# Altium PCB 3X2.5.PcbDoc
Units mm, origin at the board's own origin, x right, y up, seen from the top; angles counter-clockwise.
Board outline 25.5 x 30 mm, 4 copper layers (Top Layer, GND, MidLayer1, Bottom Layer); 24 components, 59 nets, 208 pads, 117 vias.
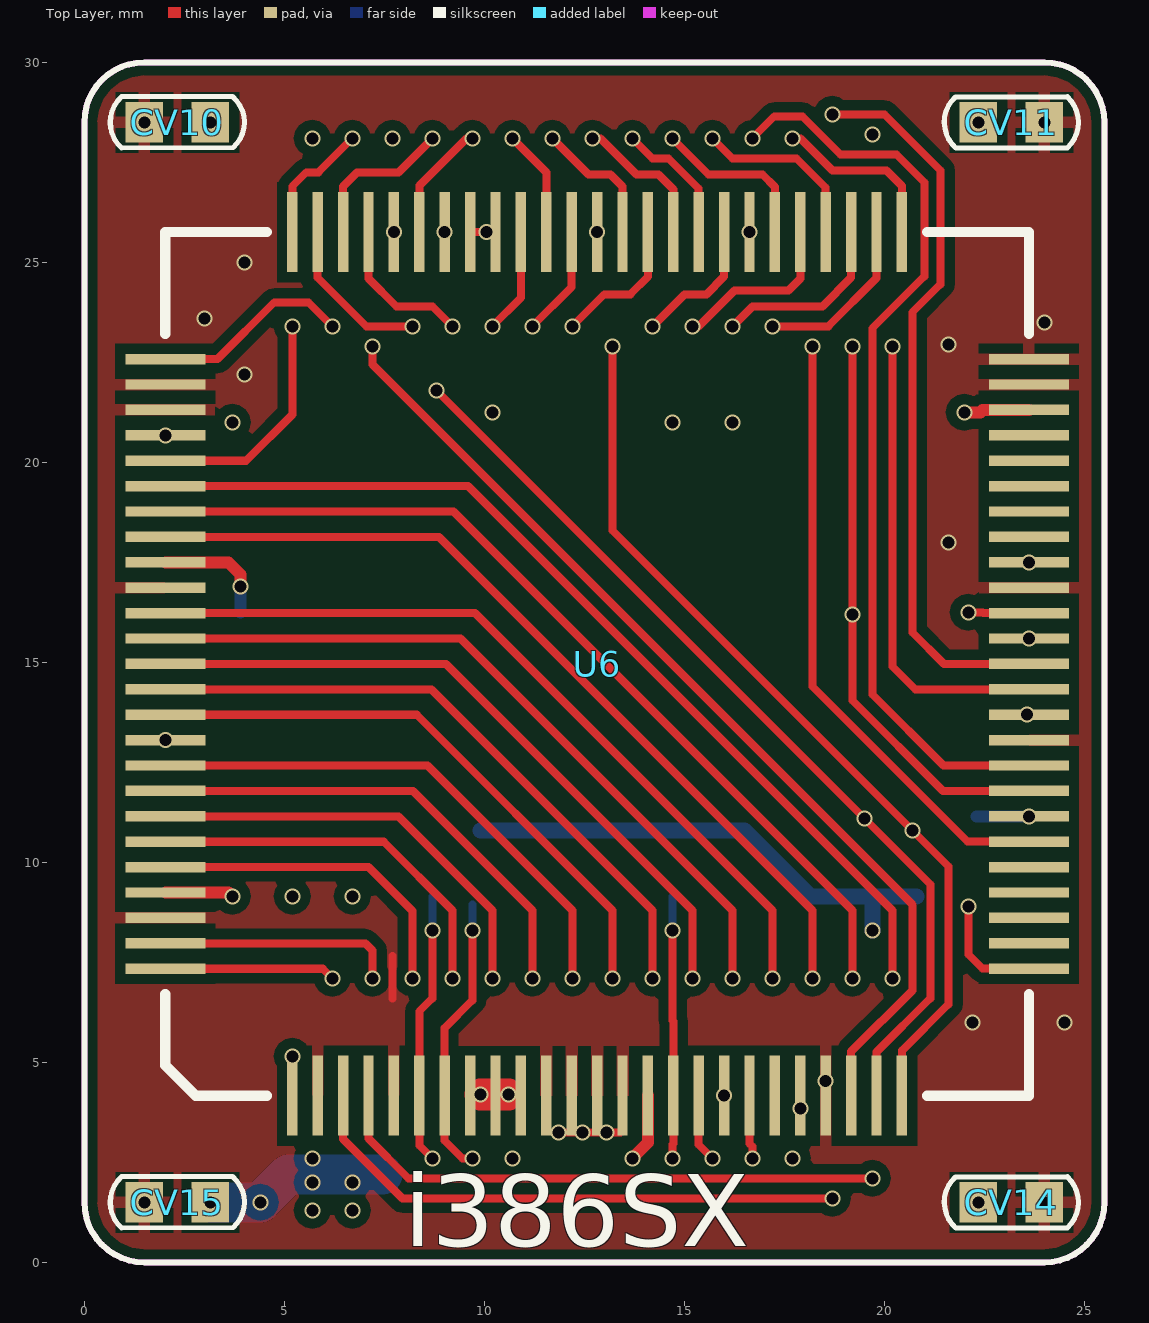
[diagram p0: Top Layer view]
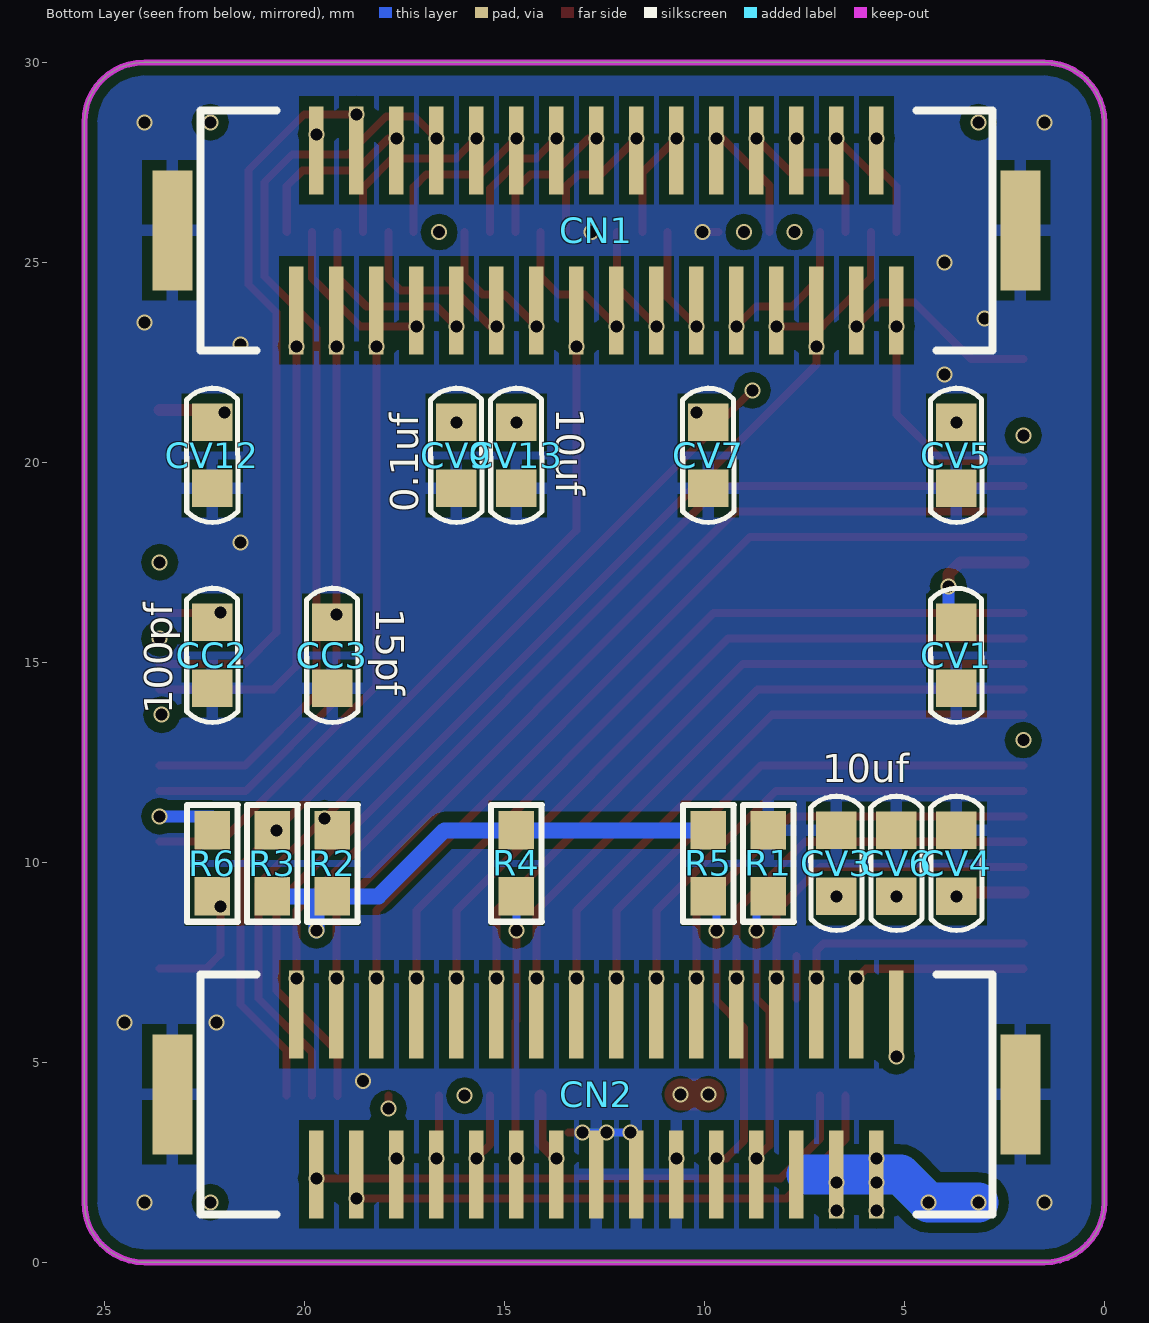
[diagram p1: Bottom Layer view, seen from below]
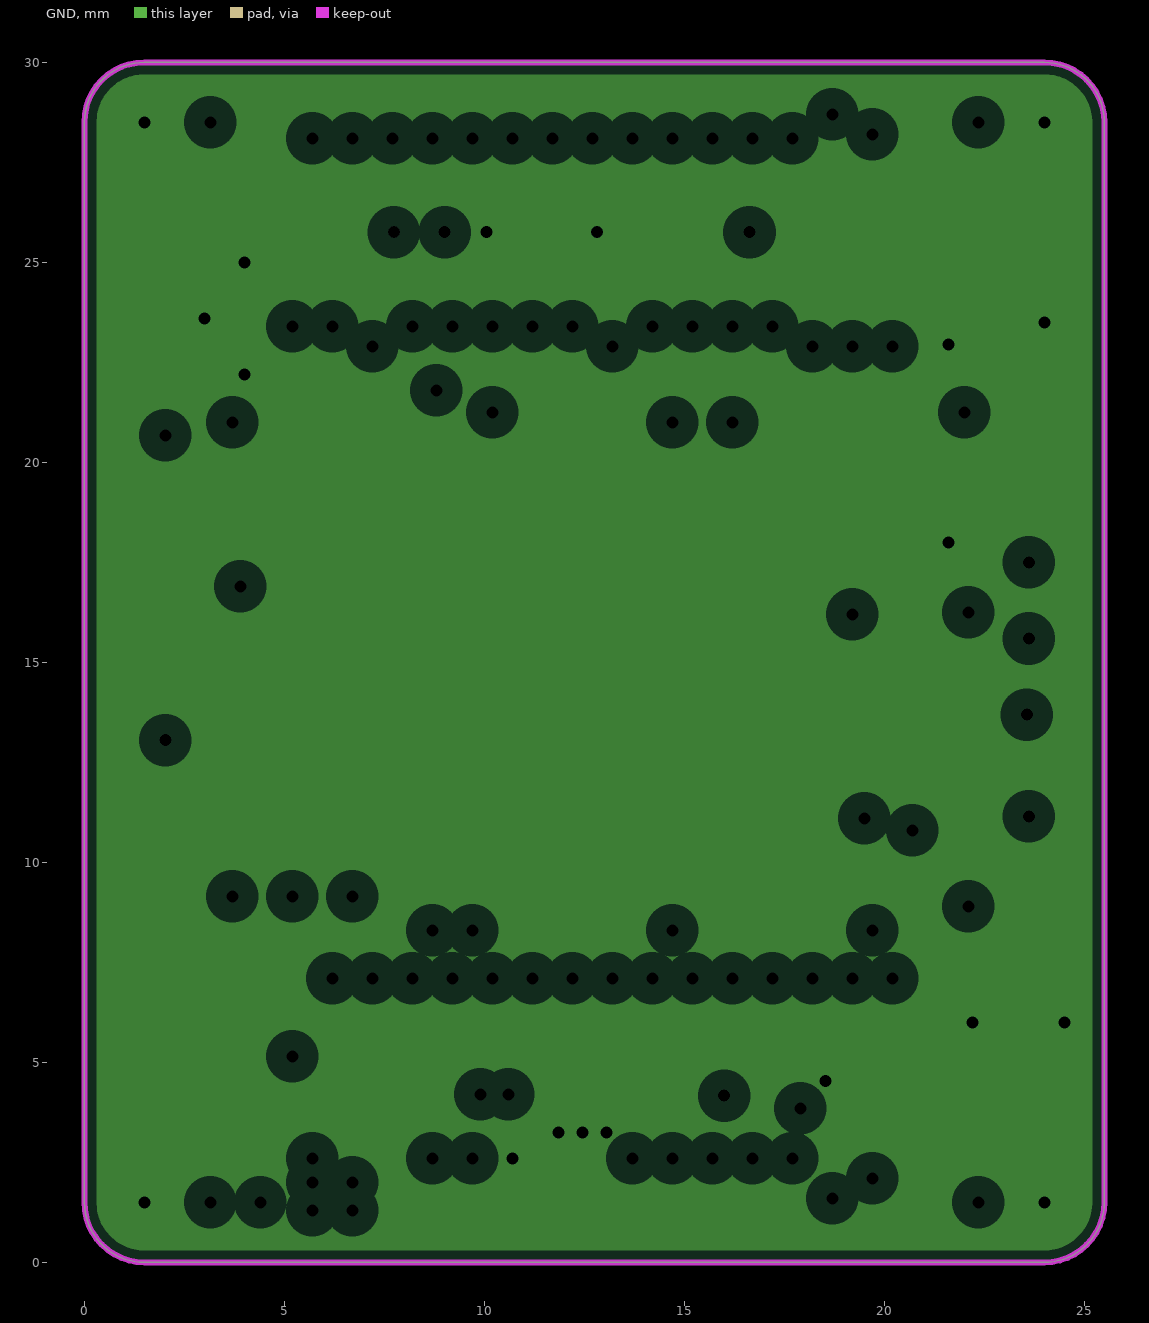
[diagram p2: GND, clearances drawn from the general rule]
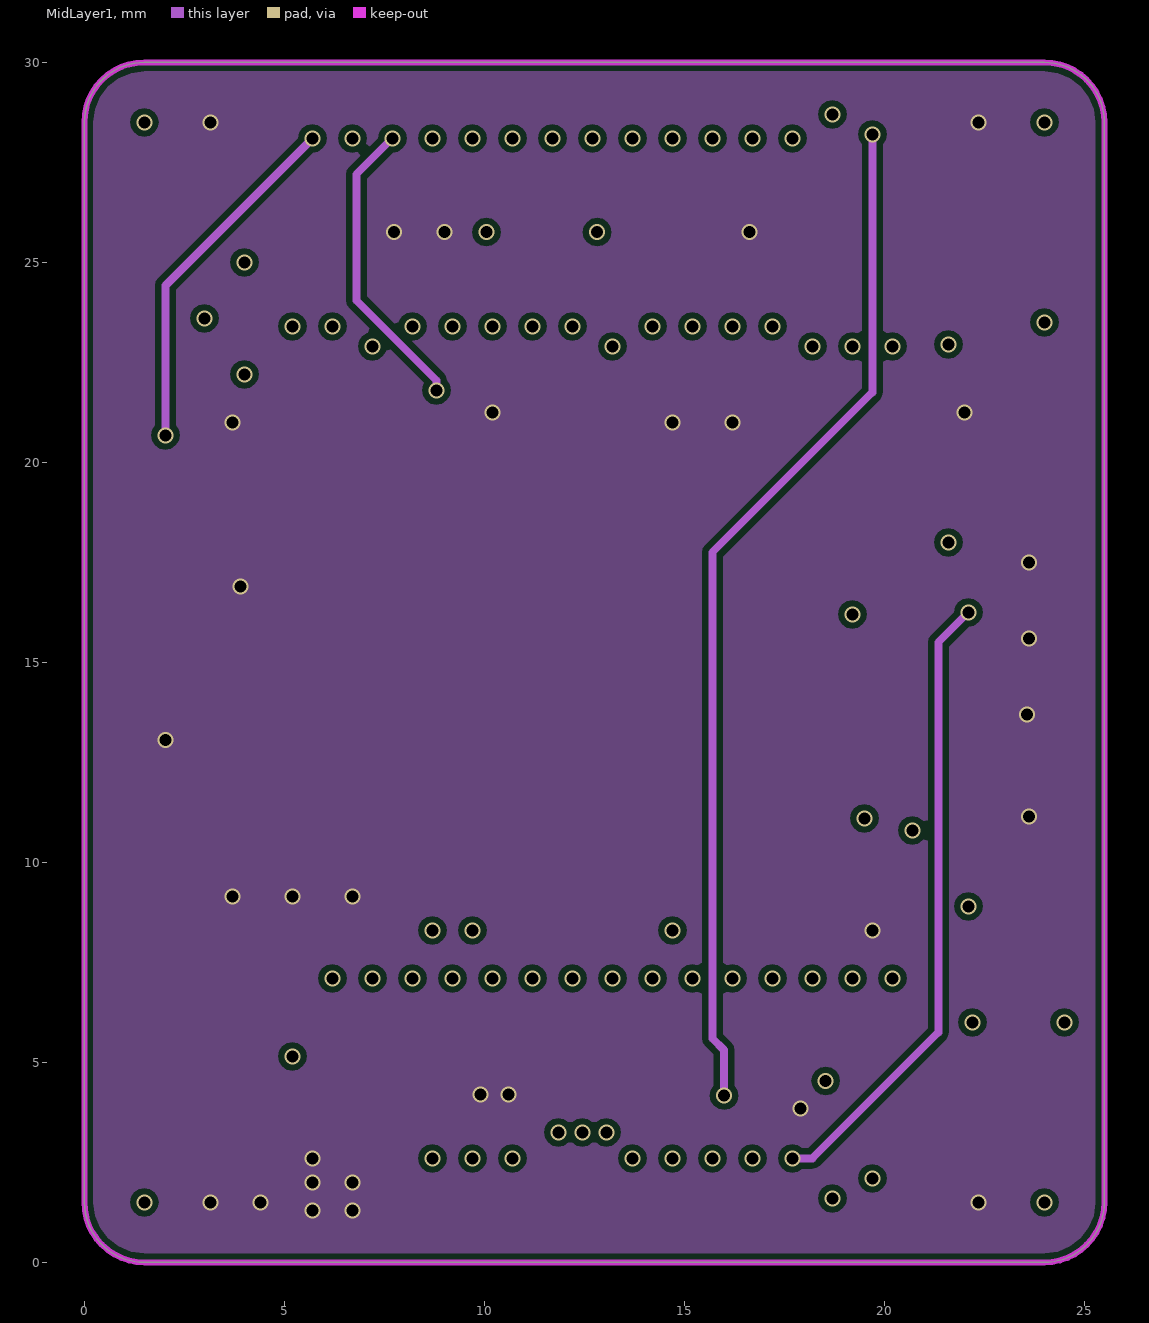
[diagram p3: MidLayer1]

## Layer stack, top to bottom
Top Layer: signal copper 0.0356
Dielectric: core 0.32, FR-4, Dk 4.8
GND: plane copper 0.0356, net GND
Dielectric: prepreg 0.32, FR-4, Dk 4.8
MidLayer1: signal copper 0.0356
Dielectric: core 0.32, FR-4, Dk 4.8
Bottom Layer: signal copper 0.0356

## Board outline
0,1.5 ccw(c1.5,1.5) 1.5,0 24,0 ccw(c24,1.5) 25.5,1.5 25.5,28.5 ccw(c24,28.5) 24,30 1.5,30 ccw(c1.5,28.5) 0,28.5

## Design rules (kind name [scope] priority, off if disabled: settings)
Clearance [All] p1: gap=0.15
ComponentClearance [All] p1: gap=0.254 collisioncheckmode=3 verticalgap=0.254
HoleSize [All] p1: absolutevalues=TRUE maxlimit=7.62 minlimit=0.3 maxpercent=80.000 minpercent=20.000
PlaneClearance [All] p1: clearance=0.508
PlaneConnect [All] p1: planeconnectstyle=Relief reliefexpansion=0.508 reliefentries=4 reliefconductorwidth=0.254 reliefairgap=0.254
PolygonConnect [All] p1: connectstyle=Relief reliefconductorwidth=0.3 reliefentries=4 polygonreliefangle="90 Angle"
RoutingVias [All] p1: holewidth=0.3 width=0.4 viastyle="Through Hole" minholewidth=0.3 minwidth=0.4 maxholewidth=0.3 maxwidth=0.4
SolderMaskExpansion [All] p1: expansion=0.102
TestPointUsage [All] p1: valid=0 allowmultiple=FALSE
Testpoint [All] p1: side=15 testpointundercomponent=TRUE minsize=1.016 maxsize=2.54 preferedsize=1.524 minholesize=0 maxholesize=1.016 preferedholesize=0.813 testpointgrid=0.025 style=1023 order=0-112345678
Width [All] p1: maxlimit=5 minlimit=0.2 preferedwidth=0.254 toplayer_prefwidth=0.2 midlayer1_prefwidth=0.2 bottomlayer_prefwidth=0.2 minimp=50.000000 maximp=50.000000 favimp=50.000000
15 further rules are at their usual default settings.

## Components (designator, comment, footprint, x,y, rotation, side; value= is the part's Value field where it differs from the comment)
CC2 "100pf" C0603 22.3,16 r270 bottom
CC3 "15pf" C0603 19.3,16 r270 bottom
CN1 "CON31P" BTB1.0-31P-B 20.2,23.8 r180 bottom
CN2 "CON31P" BTB1.0-31P-B 5.2,6.2 r0 bottom
CV1 "0.1uf" C0603 3.7,16 r270 bottom
CV3 "0.1uf" C0603 6.7,9.15 r90 bottom
CV4 "0.1uf" C0603 3.7,9.15 r90 bottom
CV5 "10uf" C0603 3.7,21 r270 bottom
CV6 "10uf" C0603 5.2,9.15 r90 bottom
CV7 "0.1uf" C0603 9.9,21 r270 bottom
CV9 "0.1uf" C0603 16.2,21 r270 bottom
CV10 "10uf" C0603 3.15,28.5 r180 top
CV11 "10uf" C0603 22.35,28.5 r0 top
CV12 "0.1uf" C0603 22.3,21 r270 bottom
CV13 "10uf" C0603 14.7,21 r270 bottom
CV14 "0.1uf" C0603 22.35,1.5 r0 top
CV15 "0.1uf" C0603 3.15,1.5 r180 top
R1 "0R" R0603 8.4,9.15 r90 bottom
R2 "4.7k" R0603 19.3,10.8 r270 bottom
R3 "4.7k" R0603 20.8,10.8 r270 bottom
R4 "4.7k" R0603 14.7,9.15 r90 bottom
R5 "4.7k" R0603 9.9,9.15 r90 bottom
R6 "4.7k" R0603 22.3,9.15 r90 bottom
U6 "386SX2" PQFP100A 5.2,4.8 r0 top

## Footprints (in the part's own frame and the unit in brackets; to place one, negate y for a bottom-side part, rotate by r counter-clockwise, add the part's x,y. Pads: shape width x height; smd on the part's side, far side on the other; paste and mask are expansions set on the pad)
BTB1.0-31P-B [mm]
  rect 1x3 smd: 0(-3.1,2) 0(18.1,2)
  rect 0.36x2.2 smd: 1(0,0) 2(1,0) 3(2,0) 4(3,0) 5(4,0) 6(5,0) 7(6,0) 8(7,0) 9(8,0) 10(9,0) 11(10,0) 12(11,0) 13(12,0) 14(13,0) 15(14,0) 16(15,0) 17(14.5,4) 18(13.5,4) 19(12.5,4) 20(11.5,4) 21(10.5,4) 22(9.5,4) 23(8.5,4) 24(7.5,4) 25(6.5,4) 26(5.5,4) 27(4.5,4) 28(3.5,4) 29(2.5,4) 30(1.5,4) 31(0.5,4)
  silkscreen extent -2.4,-1 17.4,5
C0603 [mil]
  rect 37.01x40 smd: 1(0,0)
  rect 37x40 smd: 2(64.98,0)
  silkscreen extent -34,-25 98,25
PQFP100A [mm]
  rect 0.26x2 smd: 1(0,-0.635) 2(0.635,-0.635) 3(1.27,-0.635) 4(1.905,-0.635) 5(2.54,-0.635) 6(3.175,-0.635) 7(3.81,-0.635) 8(4.445,-0.635) 9(5.08,-0.635) 10(5.715,-0.635) 11(6.35,-0.635) 12(6.985,-0.635) 13(7.62,-0.635) 14(8.255,-0.635) 15(8.89,-0.635) 16(9.525,-0.635) 17(10.16,-0.635) 18(10.795,-0.635) 19(11.43,-0.635) 20(12.065,-0.635) 21(12.7,-0.635) 22(13.335,-0.635) 23(13.97,-0.635) 24(14.605,-0.635) 25(15.24,-0.635) 51(15.24,20.955) 52(14.605,20.955) 53(13.97,20.955) 54(13.335,20.955) 55(12.7,20.955) 56(12.065,20.955) 57(11.43,20.955) 58(10.795,20.955) 59(10.16,20.955) 60(9.525,20.955) 61(8.89,20.955) 62(8.255,20.955) 63(7.62,20.955) 64(6.985,20.955) 65(6.35,20.955) 66(5.715,20.955) 67(5.08,20.955) 68(4.445,20.955) 69(3.81,20.955) 70(3.175,20.955) 71(2.54,20.955) 72(1.905,20.955) 73(1.27,20.955) 74(0.635,20.955) 75(0,20.955)
  rect 2x0.26 smd: 26(18.415,2.54) 27(18.415,3.175) 28(18.415,3.81) 29(18.415,4.445) 30(18.415,5.08) 31(18.415,5.715) 32(18.415,6.35) 33(18.415,6.985) 34(18.415,7.62) 35(18.415,8.255) 36(18.415,8.89) 37(18.415,9.525) 38(18.415,10.16) 39(18.415,10.795) 40(18.415,11.43) 41(18.415,12.065) 42(18.415,12.7) 43(18.415,13.335) 44(18.415,13.97) 45(18.415,14.605) 46(18.415,15.24) 47(18.415,15.875) 48(18.415,16.51) 49(18.415,17.145) 50(18.415,17.78) 76(-3.175,17.78) 77(-3.175,17.145) 78(-3.175,16.51) 79(-3.175,15.875) 80(-3.175,15.24) 81(-3.175,14.605) 82(-3.175,13.97) 83(-3.175,13.335) 84(-3.175,12.7) 85(-3.175,12.065) 86(-3.175,11.43) 87(-3.175,10.795) 88(-3.175,10.16) 89(-3.175,9.525) 90(-3.175,8.89) 91(-3.175,8.255) 92(-3.175,7.62) 93(-3.175,6.985) 94(-3.175,6.35) 95(-3.175,5.715) 96(-3.175,5.08) 97(-3.175,4.445) 98(-3.175,3.81) 99(-3.175,3.175) 100(-3.175,2.54)
  silkscreen extent -3.17,-0.64 18.41,20.95
R0603 [mil]
  rect 38x35 smd: 1(0,0) 2(65,0)
  silkscreen extent -25,-25 90,25

## Part data
CC2 CC3 CV1 CV3 CV4 CV5 CV6 CV7 CV9 CV10 CV11 CV12 CV13 CV14 CV15: library part CAP
CN1 CN2: library part CON51P
R1 R2 R3 R4 R5 R6: library part RES2

## Via types
v1: diameter 0.4, hole 0.3, Top Layer to Bottom Layer, 117 vias

## Nets (pads, with @x,y where several pads share a name; then routed paths per layer and width w, separated by ;. In a path a pad name is that pad's centre, name@x,y a point inside that pad or via, vN(x,y) a via of type N, cw(c..) or ccw(c..) an arc to the next point about the centre after c; other vN are vias at no path point)
80MCLK: CN2.23 U6.15 | length 1.7
  Top Layer w0.3: v1(13.7,2.6) 14.09,2.99 U6.15
386/486: CN1.3 U6.31 | length 15.5
  Top Layer w0.2: v1(18.2,22.9) 18.2,14.4 22.085,10.515 U6.31
CA1: CN1.31 U6.18 | length 25.8
  MidLayer1 w0.2: v1(15.995,4.165) 15.995,5.305 15.7,5.6 15.7,17.75 19.7,21.75 v1(19.7,28.2)
CA2: CN1.29 U6.51 | length 4.4
  Top Layer w0.203: v1(17.7,28.1) 17.9,28.1 18.7,27.3 20.05,27.3 20.44,26.91 U6.51
CA3: CN1.4 U6.52 | length 4.3
  Top Layer w0.2: v1(17.2,23.4) 18.6,23.4 19.805,24.605 U6.52
CA4: CN1.5 U6.53 | length 4.6
  Top Layer w0.203: v1(16.2,23.4) 16.7,23.9 18.45,23.9 19.17,24.62 U6.53
CA5: CN1.27 U6.54 | length 4.5
  Top Layer w0.2: v1(15.7,28.1) 16.2,27.6 17.8,27.6 18.535,26.865 U6.54
CA6: CN1.6 U6.55 | length 4.4
  Top Layer w0.203: v1(15.2,23.4) 15.35,23.4 16.25,24.3 17.6,24.3 17.9,24.6 U6.55
CA7: CN1.26 U6.56 | length 4.2
  Top Layer w0.2: v1(14.7,28.1) 15.6,27.2 16.95,27.2 17.265,26.885 U6.56
CA8: CN1.7 U6.58 | length 3.4
  Top Layer w0.203: v1(14.2,23.4) 15,24.2 15.55,24.2 15.995,24.645 U6.58
CA9: CN1.25 U6.59 | length 3.3
  Top Layer w0.2: v1(13.7,28.1) 14.2,27.6 14.6,27.6 15.36,26.84 U6.59
CA10: CN1.24 U6.60 | length 3.6
  Top Layer w0.203: v1(12.7,28.1) 12.9,28.1 13.8,27.2 14.35,27.2 14.725,26.825 U6.60
CA11: CN1.9 U6.61 | length 3.5
  Top Layer w0.2: v1(12.2,23.4) 13,24.2 13.65,24.2 14.09,24.64 U6.61
CA12: CN1.23 U6.62 | length 3.4
  Top Layer w0.203: v1(11.7,28.1) 12.6,27.2 13.15,27.2 13.455,26.895 U6.62
CA13: CN1.10 U6.64 | length 2.8
  Top Layer w0.2: v1(11.2,23.4) 12.185,24.385 U6.64
CA14: CN1.22 U6.65 | length 2.7
  Top Layer w0.203: v1(10.7,28.1) 11.55,27.25 U6.65
CA15: CN1.11 U6.66 | length 2.7
  Top Layer w0.2: v1(10.2,23.4) 10.915,24.115 U6.66
CA16: CN1.21 U6.70 | length 3
  Top Layer w0.203: U6.70 8.375,26.925 9.55,28.1 v1(9.7,28.1)
CA17: CN1.12 U6.72 | length 3.7
  Top Layer w0.2: U6.72 7.105,24.595 7.8,23.9 8.7,23.9 v1(9.2,23.4)
CA18: CN1.20 U6.73 | length 3.9
  Top Layer w0.203: U6.73 6.47,26.9 6.82,27.25 7.85,27.25 v1(8.7,28.1)
CA19: CN1.13 U6.74 | length 4
  Top Layer w0.2: U6.74 5.835,24.615 7.05,23.4 v1(8.2,23.4)
CA20: CN1.18 U6.75 | length 3.1
  Top Layer w0.2: U6.75 5.2,26.9 5.55,27.25 5.85,27.25 v1(6.7,28.1)
CA21: CN1.15 U6.76 | length 5
  Top Layer w0.2: U6.76 3.33,22.58 4.75,24 5.6,24 v1(6.2,23.4)
CA22: CN1.17 U6.79 | length 8.9
  MidLayer1 w0.203: v1(2.025,20.675) 2.025,24.425 v1(5.7,28.1)
CA23: CN1.16 U6.80 | length 5.9
  Top Layer w0.203: U6.80 4.04,20.04 5.2,21.2 v1(5.2,23.4)
CD0: CN2.1 U6.1
  other v1: 5.2,5.15
CD1: CN2.2 U6.100 | length 4.3
  Top Layer w0.203: U6.100 5.96,7.34 v1(6.2,7.1)
CD2: CN2.3 U6.99 | length 5.9
  Top Layer w0.203: U6.99 7.025,7.975 7.2,7.8 v1(7.2,7.1)
CD3: CN2.4 U6.96 | length 8.3
  Top Layer w0.203: U6.96 7.1,9.88 8.2,8.78 v1(8.2,7.1)
CD4: CN2.5 U6.95 | length 9.6
  Top Layer w0.203: U6.95 7.485,10.515 9.2,8.8 v1(9.2,7.1)
CD5: CN2.6 U6.94 | length 10.8
  Top Layer w0.203: U6.94 7.85,11.15 10.2,8.8 v1(10.2,7.1)
CD6: CN2.7 U6.93 | length 12.1
  Top Layer w0.203: U6.93 8.215,11.785 11.2,8.8 v1(11.2,7.1)
CD7: CN2.8 U6.92 | length 13.4
  Top Layer w0.203: U6.92 8.58,12.42 12.2,8.8 v1(12.2,7.1)
CD8: CN2.9 U6.90 | length 14.9
  Top Layer w0.203: U6.90 8.31,13.69 13.2,8.8 v1(13.2,7.1)
CD9: CN2.10 U6.89 | length 16.2
  Top Layer w0.203: U6.89 8.675,14.325 14.2,8.8 v1(14.2,7.1)
CD10: CN2.11 U6.88 | length 17.4
  Top Layer w0.203: U6.88 9.04,14.96 15.2,8.8 v1(15.2,7.1)
CD11: CN2.12 U6.87 | length 18.7
  Top Layer w0.203: U6.87 9.405,15.595 16.2,8.8 v1(16.2,7.1)
CD12: CN2.13 U6.86 | length 20
  Top Layer w0.203: U6.86 9.77,16.23 17.2,8.8 v1(17.2,7.1)
CD13: CN2.14 U6.83 | length 21.7
  Top Layer w0.203: U6.83 8.865,18.135 18.2,8.8 v1(18.2,7.1)
CD14: CN2.15 U6.82 | length 23
  Top Layer w0.203: U6.82 9.23,18.77 19.2,8.8 v1(19.2,7.1)
CD15: CN2.16 U6.81 | length 24.3
  Top Layer w0.203: U6.81 9.595,19.405 20.2,8.8 v1(20.2,7.1)
CPU_*ADS: CN2.22 R4.1 U6.16 | length 6.6
  Top Layer w0.2: v1(14.7,2.6) 14.7,2.95 14.725,2.975 14.725,6.025 14.7,6.05 v1(14.7,8.3)
  Bottom Layer w0.2: v1(14.7,8.3) R4.1
CPU_*BHE: CN2.20 U6.19 | length 1.6
  Top Layer w0.2: U6.19 16.63,2.97 16.7,2.9 v1(16.7,2.6)
CPU_*BLE: CN2.21 U6.17 | length 1.7
  Top Layer w0.2: U6.17 15.36,2.94 v1(15.7,2.6)
CPU_*BUSY: CN1.28 U6.34 | length 23.2
  Top Layer w0.2: v1(16.7,28.1) 17.25,28.65 17.95,28.65 18.9,27.7 20.3,27.7 21,27 21,24.65 19.7,23.35 19.7,14.2 21.48,12.42 U6.34
CPU_*READY: CN2.27 R5.1 U6.7 | length 7.1
  Top Layer w0.2: v1(9.7,2.6) 9.45,2.6 9.01,3.04 9.01,5.86 9.7,6.55 v1(9.7,8.3)
  Bottom Layer w0.2: v1(9.7,8.3) R5.1@9.7,8.95
CPU_D/*C: CN1.19 R2.1 U6.24 | length 30.8
  Top Layer w0.2: v1(8.8,21.8) 21.15,9.45 21.15,6.6 19.805,5.255 U6.24
  MidLayer1 w0.2: v1(7.7,28.1) 6.8,27.2 6.8,24.05 8.8,22.05 v1(8.8,21.8)
  other v1: 19.5,11.1
CPU_HLDA: CN2.18 U6.3 | length 13.9
  Top Layer w0.203: U6.3 6.47,3.08 7.95,1.6 v1(18.7,1.6)
CPU_HOLD: CN2.17 U6.4 | length 14.1
  Top Layer w0.2: U6.4 7.105,3.095 8.1,2.1 v1(19.7,2.1)
CPU_INTR: CC2.1 CN2.19 U6.40 | length 17.3
  Top Layer w0.2: v1(22.1,16.25) 22.46,16.25 22.48,16.23 U6.40
  MidLayer1 w0.2: v1(17.7,2.6) 18.2,2.6 21.35,5.75 21.35,15.5 v1(22.1,16.25)
CPU_M/*IO: CN1.14 U6.23 | length 25
  Top Layer w0.203: v1(7.2,22.9) 7.2,22.45 20.7,8.95 20.7,6.8 19.17,5.27 U6.23
CPU_NMI: CN1.30 U6.38 | length 18.4
  Top Layer w0.2: v1(18.7,28.7) 20,28.7 21.4,27.3 21.4,24.45 20.7,23.75 20.7,15.75 21.49,14.96 U6.38
CPU_PEREQ: CN1.1 U6.37 | length 11.7
  Top Layer w0.2: v1(20.2,22.9) 20.2,14.9 20.775,14.325 U6.37
CPU_RESET: CC3.1 CN1.2 U6.33 | length 14.2
  Top Layer w0.2: v1(19.2,22.9) 19.2,14.05 21.465,11.785 U6.33
  other v1: 19.2,16.2
CPU_W/*R: CN1.8 R3.1 U6.25 | length 22.7
  Top Layer w0.2: v1(13.2,22.9) 13.2,18.3 21.6,9.9 21.6,6.45 20.44,5.29 U6.25
  other v1: 20.7,10.8
GND: CC2.2 CC3.2 CN1.0 CN2.0 CN2.24 CN2.25 CN2.26 CV1.2 CV3.2 CV4.2 CV5.2 CV6.2 CV7.2 CV9.2 CV10.2 CV11.2 CV12.2 CV13.2 CV14.2 CV15.2 R1.2 U6.2 U6.5 U6.11 U6.12 U6.13 U6.14 U6.22 U6.35 U6.41 U6.49 U6.50 U6.63 U6.67 U6.68 U6.77 U6.78 U6.85 U6.98 | length 4.2
  Top Layer w0.2: 7.7,6.6 7.7,7.658 ; U6.68 v1(10.05,25.755) ; v1(11.85,3.25) U6.14@13.4,3.25
  Bottom Layer w0.2: v1(11.85,3.25) v1(13.05,3.25)
  other v1: 1.499,1.5 24.001,1.5 10.7,2.6 12.45,3.25 18.535,4.535 22.2,6 24.5,6 21.6,18 4,22.2 21.6,22.95 24,23.5 3,23.6 4,25 12.82,25.755 1.499,28.5 24.001,28.5
NetR6_1: R6.1 U6.26 | length 2.9
  Top Layer w0.2: v1(22.1,8.9) 22.1,7.7 22.46,7.34 U6.26
PIPELINE: CN2.28 R1.1 U6.6 | length 6.8
  Top Layer w0.2: v1(8.7,2.6) 8.375,2.925 8.375,6.275 8.7,6.6 v1(8.7,8.3)
  Bottom Layer w0.2: v1(8.7,8.3) R1.1@8.7,9.15
VCC: CN2.29 CN2.30 CN2.31 CV1.1 CV3.1 CV4.1 CV5.1 CV6.1 CV7.1 CV9.1 CV10.1 CV11.1 CV12.1 CV13.1 CV14.1 CV15.1 R2.2 R3.2 R4.2 R5.2 R6.2 U6.8 U6.9 U6.10 U6.21 U6.32 U6.36 U6.39 U6.42 U6.48 U6.57 U6.69 U6.71 U6.84 U6.91 U6.97 | length 25.6
  Top Layer w0.2: v1(17.9,3.85) U6.21
  Top Layer w0.3: U6.97 3.605,9.245 v1(3.7,9.15) ; U6.84 3.6,17.5 3.9,17.2 v1(3.9,16.9) ; v1(22,21.25) 22.4,21.25 22.46,21.31 U6.48
  Top Layer w0.8: v1(9.9,4.2) v1(10.6,4.2)
  Bottom Layer w0.3: CV1.1@3.9,16.25 v1(3.9,16.9) ; R6.2@22.3,11.15 v1(23.615,11.15)
  Bottom Layer w0.4: R5.2 16.499,10.801 18.151,9.149 R3.2 ; v1(19.7,8.3) R2.2@19.7,9.099
  Bottom Layer w1: v1(3.15,1.5) v1(4.4,1.5) 5.1,2.2 7.45,2.2
  other v1: 5.7,1.3 6.7,1.3 22.35,1.5 5.7,2 6.7,2 5.7,2.6 5.2,9.15 6.7,9.15 2.025,13.055 23.565,13.69 23.615,15.595 23.615,17.5 3.7,21 14.7,21 16.2,21 10.2,21.25 7.74,25.755 9.01,25.755 16.63,25.755 3.15,28.5 22.35,28.5
pads on no net: U6.20 U6.27 U6.28 U6.29 U6.30 U6.43 U6.44 U6.45 U6.46 U6.47

## Polygon pours and split planes (outlines as drawn)
GND on Top Layer "Top Layer-No Net 1" (solid, remove dead copper): 0,0 25.5,0 25.5,30 0,30
VCC on MidLayer1 "Top Layer-No Net 1" (solid, remove dead copper): 0,0 25.5,0 25.5,0.05 25.5,30 0,30
GND on Bottom Layer "Top Layer-No Net 1" (solid, remove dead copper): 0,0 25.5,0 25.5,30 0,30 0,30.05
GND on GND (split plane): 1.5,29.694 24,29.694 24.01,29.696 24.31,29.657 24.599,29.537 24.847,29.347 25.037,29.099 25.157,28.81 25.196,28.51 25.194,28.5 25.194,1.5 25.196,1.49 25.157,1.19 25.037,0.901 24.847,0.653 24.599,0.463 24.31,0.343 24.01,0.304 24,0.306 1.5,0.306 1.49,0.304 1.19,0.343 0.901,0.463 0.653,0.653 0.463,0.901 0.343,1.19 0.304,1.49 0.306,1.5 0.306,28.5 0.304,28.51 0.343,28.81 0.463,29.099 0.653,29.347 0.901,29.537 1.19,29.657 1.49,29.696

## Keep-outs
Keep-Out Layer:
  the board outline again, w0.15

## Silkscreen, mask and mechanical layers (free items; w line width, h text height)
Top Overlay:
  the board outline again, w0.15
  text "i386SX" at 8,0.4 h1.8